# EAGLE board distribution_board_f1 (EAGLE 8.7.1), part 1 of 2
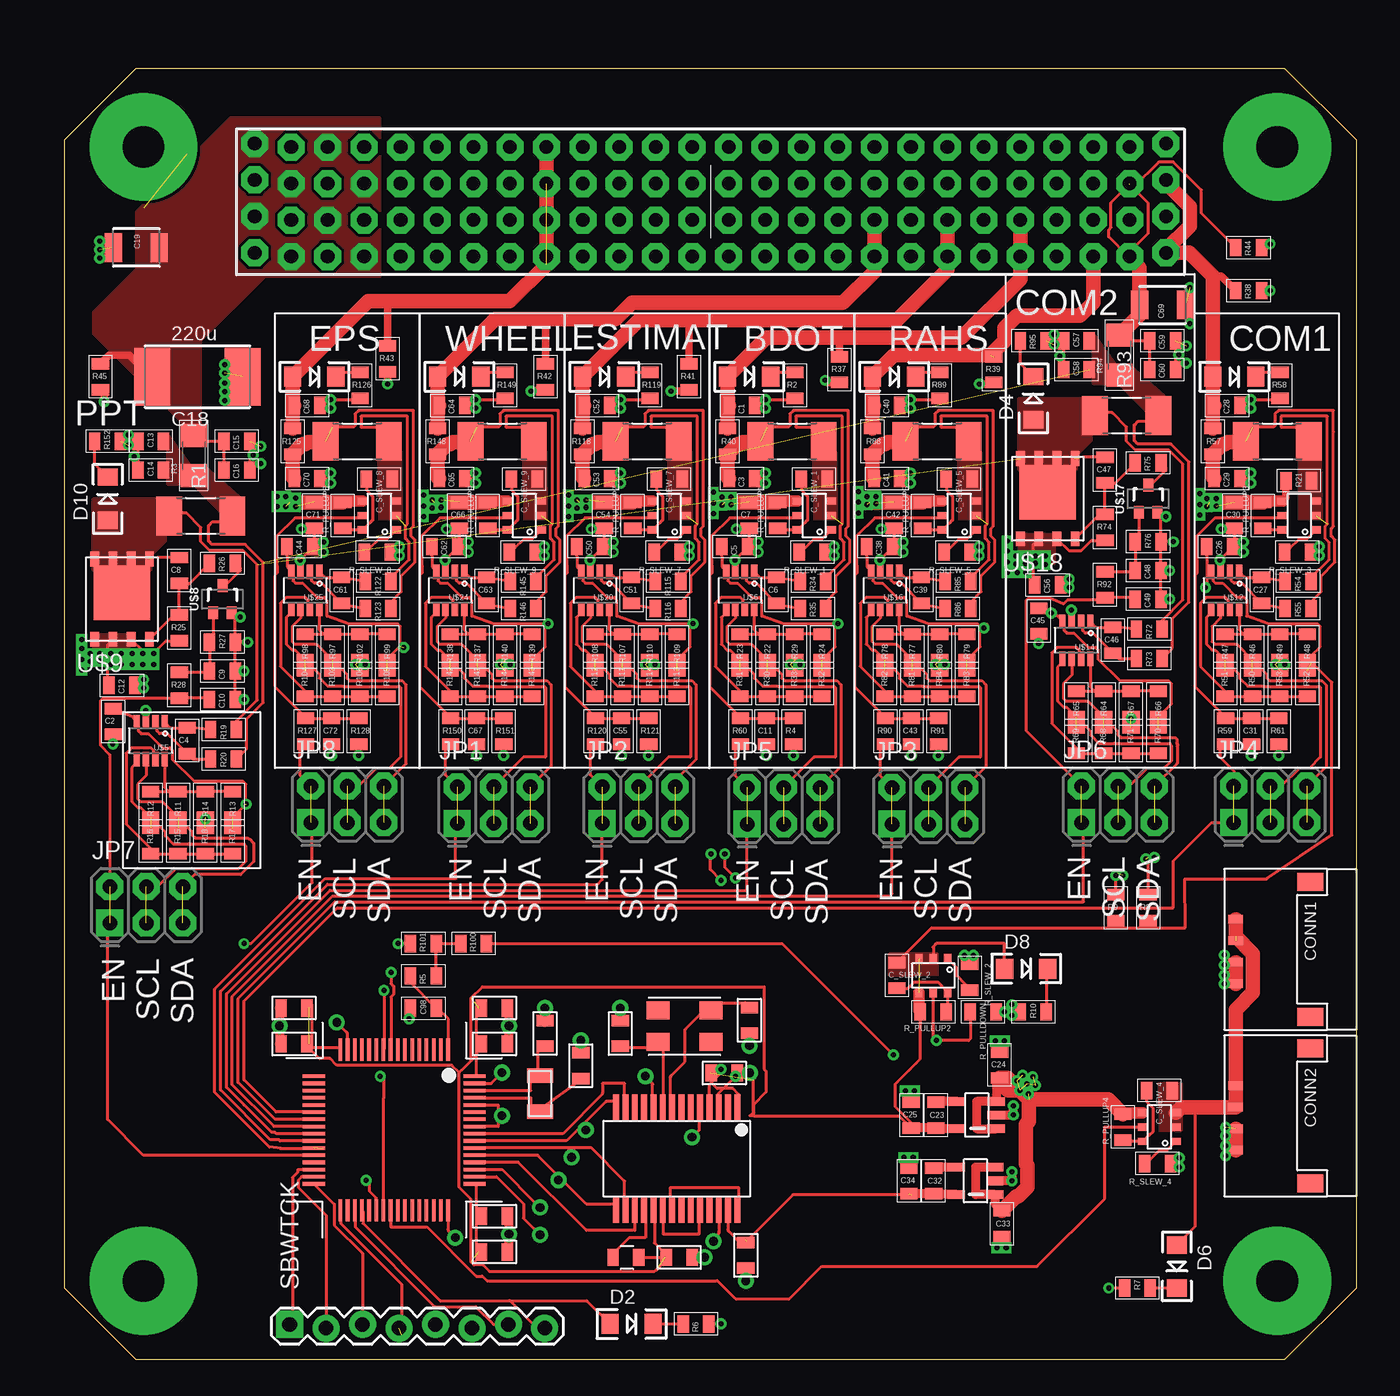
[diagram p0: board, top side]
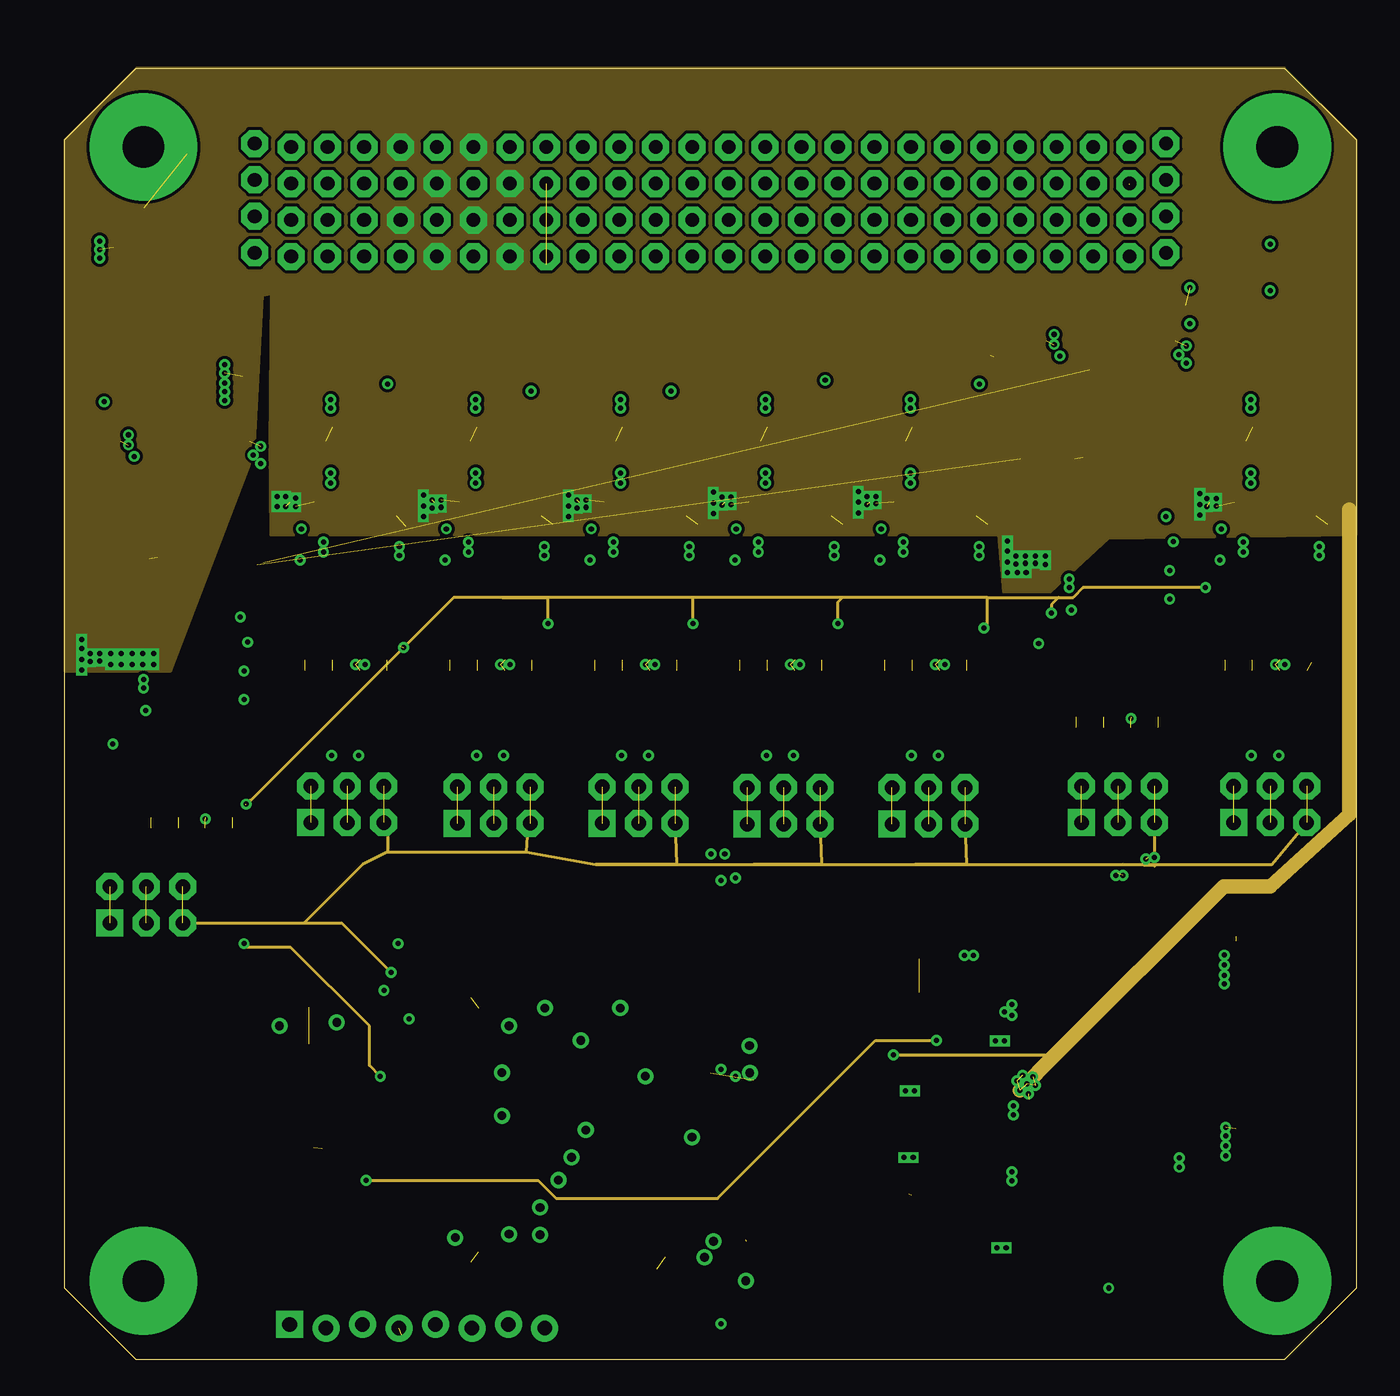
[diagram p1: board, inner layer Route2]
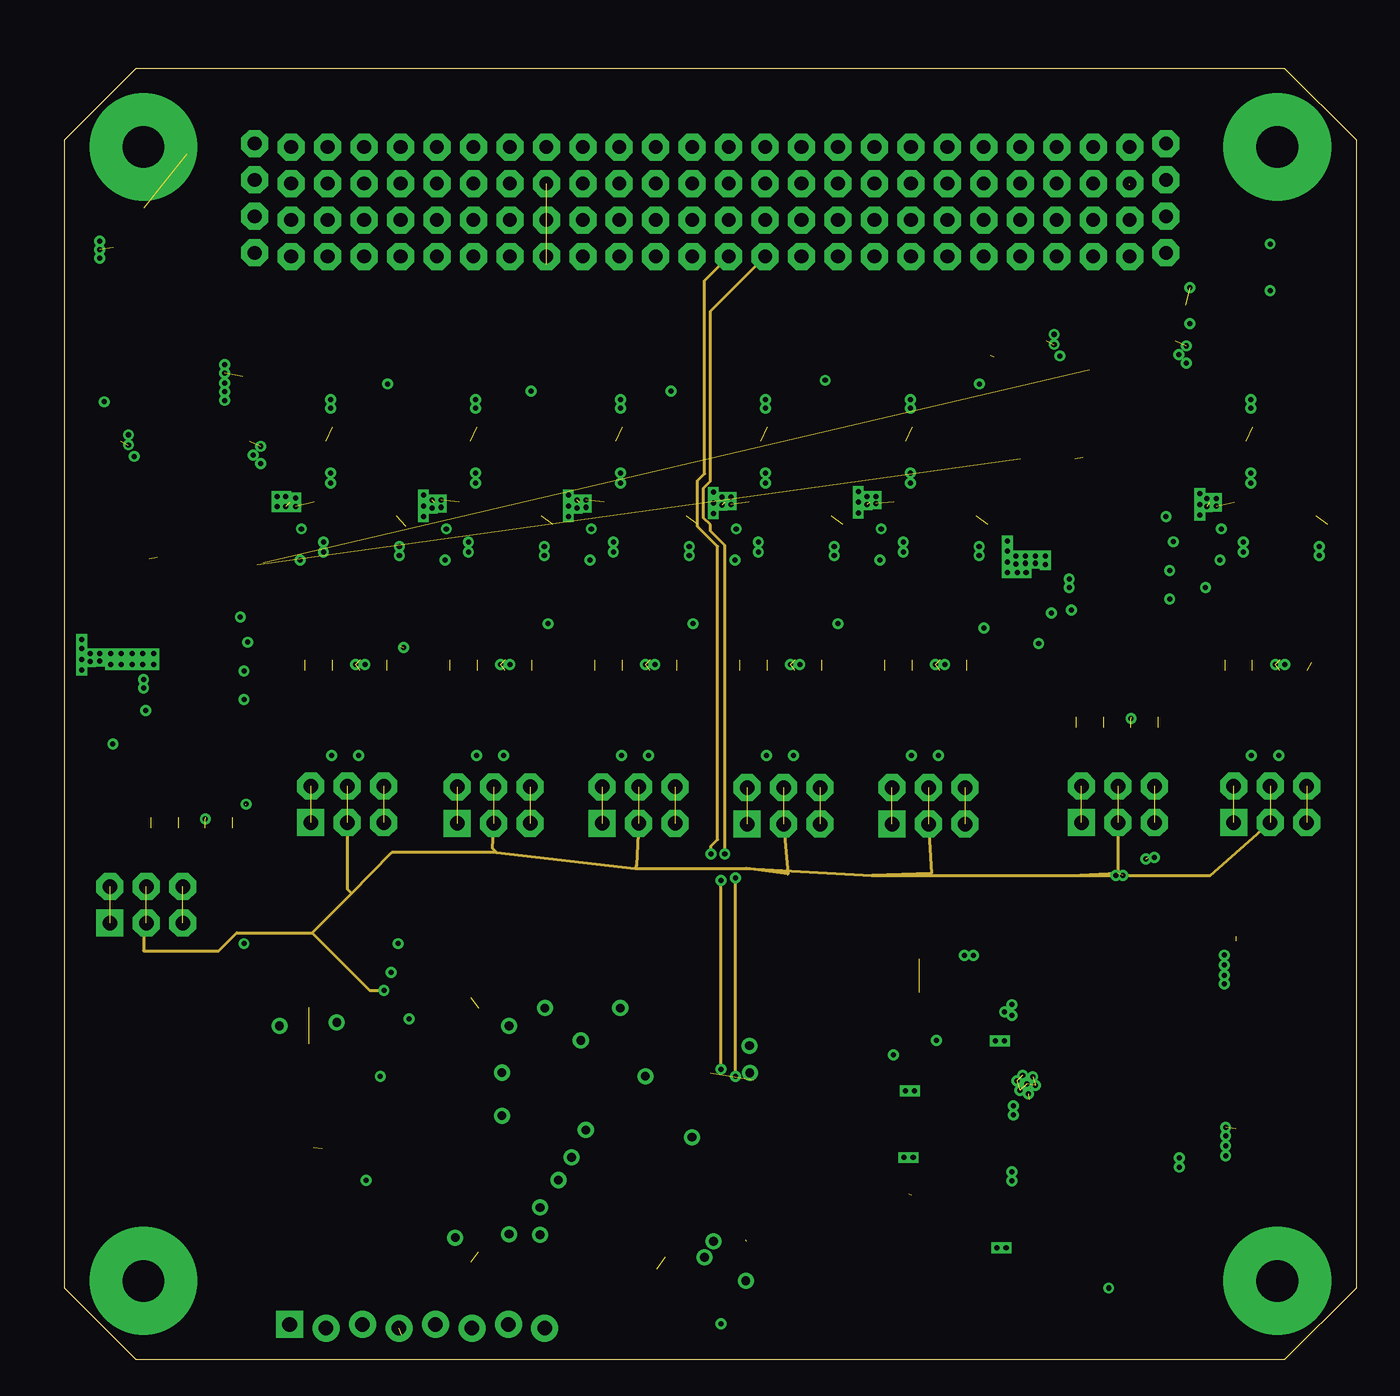
[diagram p2: board, inner layer Route3]
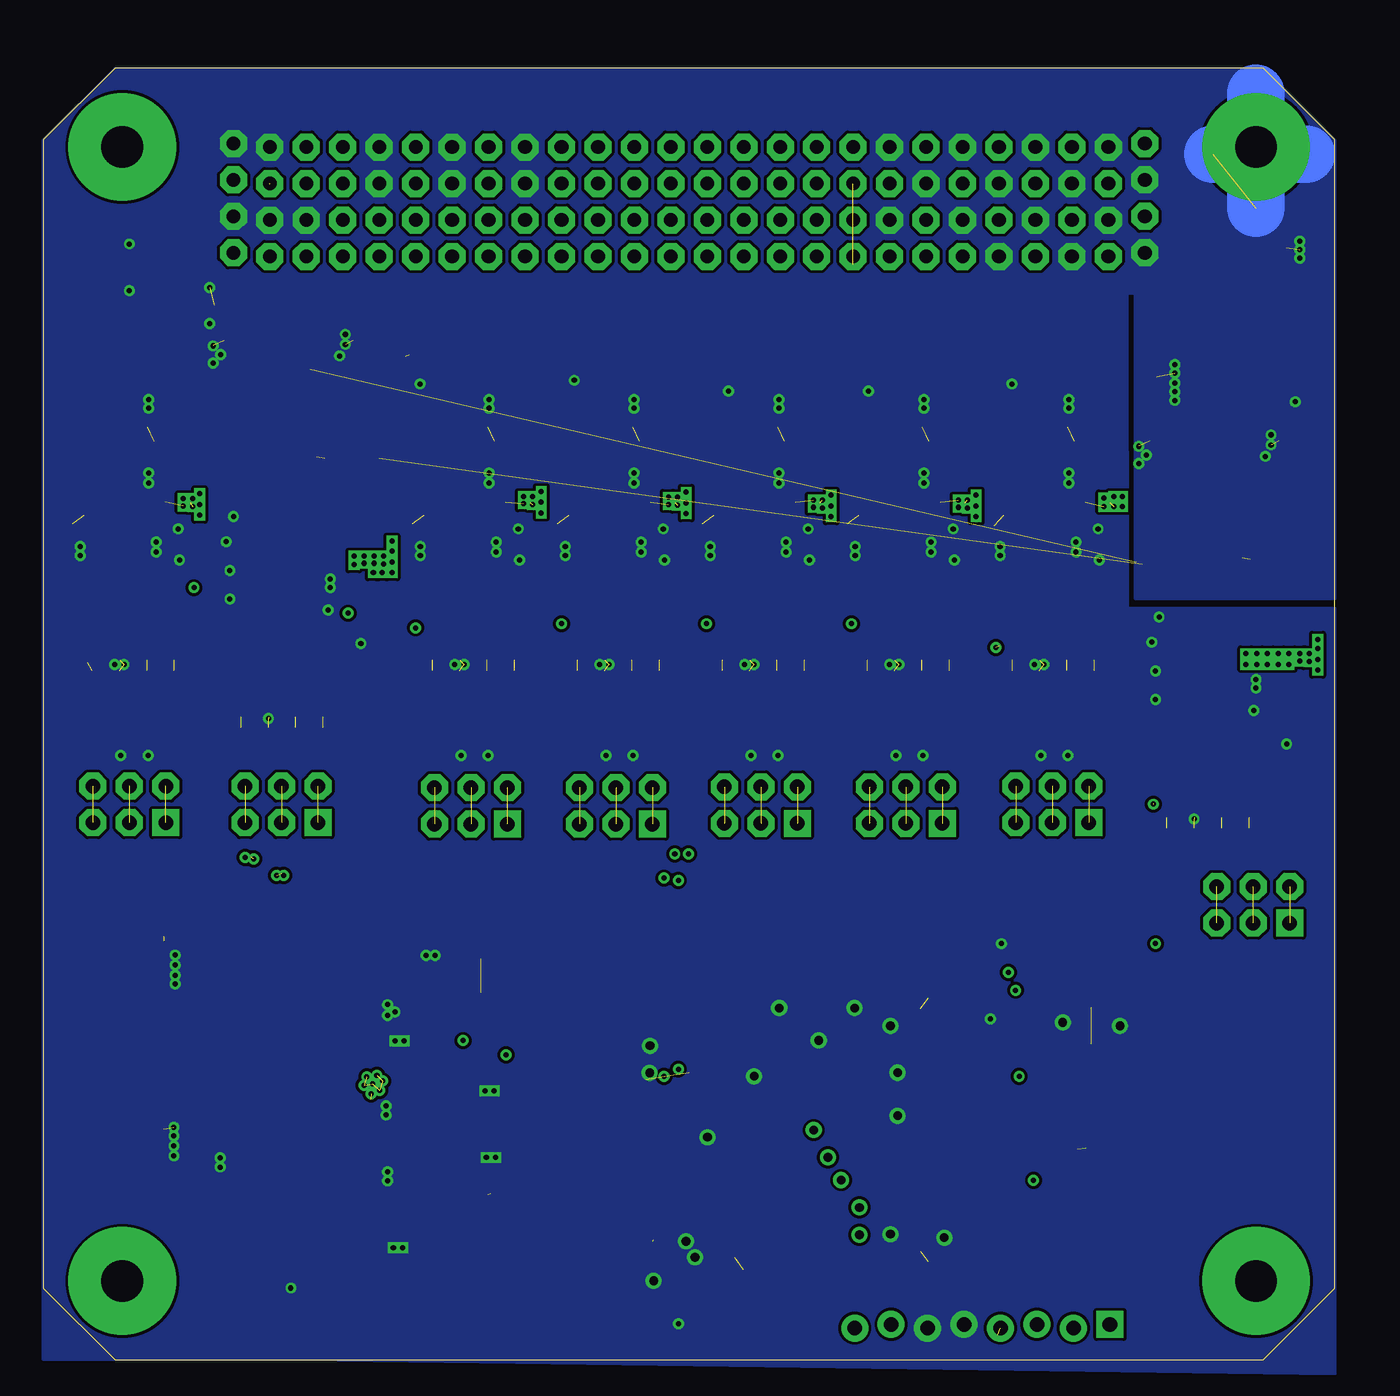
[diagram p3: board, bottom side, seen from below]

Size 90 x 90 mm. Coordinates in mm from the lower left corner, seen from the top.
Copper layers (1*2*3*16): Top 0.035mm / dielectric 1.5mm / Route2 0.035mm / dielectric 0.15mm / Route3 0.035mm / dielectric 0.2mm / Bottom 0.035mm
Design rules "default *": minimum track width 6mil, minimum drill 0.35mm, track to track 8mil, track to pad 8mil, pad to pad 8mil, via to via 8mil, smd to smd 8mil, copper to edge 0mil, drill to drill 8mil, minimum pad ring 10mil, minimum via ring 8mil, stop-mask expansion 4mil, vias tented up to drill 0mil, thermal gap 10mil

## Footprints (pad centres in the part's own frame; a part is rotated, then mirrored left to right if it is on the bottom)
MSP-CAN_BLOCK = smd 1.2 x 0.8: 1 -6,6.08; 2 -6,7.88; 3 -8.5,6.08; 4 -8.5,7.88; 9 -8.5,-6.08; 10 -8.5,-7.88; 11 -6,-6.08; 12 -6,-7.88; 13 8.5,6.08; 14 8.5,7.88; 15 6,6.08; 16 6,7.88; 23 8.875,18.955; 24 8.875,20.755; 25 8.875,17.045; 26 8.875,15.245; 27 -3.975,22.105; 28 -3.975,23.905 | smd 1 x 0.25: 3.3V@CAN1 -3.975,22.025; 3.3V@CAN2 8.875,18.875; 3.3V@MSP1 8.501,5.884; 3.3V@MSP2 -8.533,-5.962; 3.3V_ANALOG@MSP2 -8.482,5.904 | smd 0.8 x 1.2: 5 -5.83,10.5; 6 -7.63,10.5; 7 -3.58,13; 8 -5.38,13; 17 -8.545,24.75; 18 -6.745,24.75; 19 -5.83,15.75; 20 -7.63,15.75; 21 7.83,24.5; 22 9.63,24.5 | smd 0.25 x 1: 5V 7.65,24.5 | smd 1.75 x 0.4: CANH -1.6,21.96; CANL -1.6,22.61; P$65 -1.6,23.91; P$66 -1.6,23.26; P$69 -1.6,21.31; P$70 -1.6,20.66; P$71 -1.6,20.01; P$72 -1.6,19.36; P$73 -1.6,18.71; P$74 -1.6,18.06; P$75 -1.6,17.41; P$76 -1.6,16.76; P$77 -1.6,16.11; P$78 -1.6,15.46; P$79 5.6,15.46; P$80 5.6,16.11; P$81 5.6,16.76; P$82 5.6,17.41; P$83 5.6,18.06; P$84 5.6,18.71; P$85 5.6,19.36; P$86 5.6,20.01; P$87 5.6,20.66; P$88 5.6,21.31; P$89 5.6,21.96; P$90 5.6,22.61; P$91 5.6,23.26; P$92 5.6,23.91 | drill 0.61: GND@1 -3.975,24.775; GND@2 -5.875,24.75; GND@3 -3.75,17.5; GND@4 0.5,20.75; GND@5 -8.5,15.75; GND@7 -8.5,10.5; GND@8 -7.25,8; GND@9 -4,7.5; GND@10 -1,7.5; GND@11 7.75,22.25; GND@12 10.5,24.5; GND@13 8.875,21.625; GND@14 7.25,8; GND@15 7.5,4.25; GND@16 -7.5,-4; GND@17 -7.25,-8; GND@26 -6.25,13; P2.4_SPI-CS2 5.397,10.16; P2.7_SPI-CS3 7.303,10.16; P5.4_SPI-MOSI 3.487,11.434; P5.5_SPI-MISO 1.9,12.354; P5.6_SPI-CLK 0,13.348 | smd 1.55 x 0.25: P1.0_A0 -5.6,3.75; P1.1_A1 -5.6,3.25; P1.2_A2 -5.6,2.75; P1.3_A3 -5.6,-1.75; P1.4_A4 -5.6,-2.25; P1.5_A5 -5.6,-2.75; P1.6_GPIO/PWM 5.6,-0.75; P1.7_GPIO/PWM 5.6,-0.25; P2.1_RXD 5.6,-3.75; P2.2_GPIO/PWM 5.6,-3.25; P3.0_A12 -5.6,2.25; P3.1_A13 -5.6,1.75; P3.2_A14 -5.6,1.25; P3.3_A15 -5.6,0.75; P3.4_GPIO_DEBUG 5.6,-2.75; P3.5_GPIO_DEBUG 5.6,-2.25; P3.6_GPIO/PWM 5.6,-1.75; P3.7_GPIO/PWM 5.6,-1.25; P5.0_I2C-SDA-1 5.6,0.25; P5.1_I2C-SCL-1 5.6,0.75; P7.0_I2C-SDA-2 -5.6,-0.25; P7.1_I2C-SCL-2 -5.6,-0.75; P$8 -5.6,0.25; P$11 -5.6,-1.25; P$15 -5.6,-3.25; P$16 -5.6,-3.75; P$43 5.6,1.25; P$44 5.6,1.75; P$45 5.6,2.25; P$46 5.6,2.75; P$47 5.6,3.25; P$48 5.6,3.75 | smd 0.25 x 1.55: P2.0_TXD 3.75,-5.6; P2.5_GPIO 1.75,-5.6; P2.6_GPIO/PWM 2.25,-5.6; P4.0_GPIO -0.25,-5.6; P4.1_GPIO 0.25,-5.6; P4.2_GPIO 0.75,-5.6; P4.3_GPIO 1.25,-5.6; P7.2_SYNC1 -1.75,-5.6; P7.3_GPIO -1.25,-5.6; P7.4_GPIO -0.75,-5.6; P$17 -3.75,-5.6; P$18 -3.25,-5.6; P$19 -2.75,-5.6; P$49 3.75,5.6; P$50 3.25,5.6; P$51 2.75,5.6; P$52 2.25,5.6; P$53 1.75,5.6; P$54 1.25,5.6; P$55 0.75,5.6; P$56 0.25,5.6; P$57 -0.25,5.6; P$58 -0.75,5.6; P$59 -1.25,5.6; P$60 -1.75,5.6; P$61 -2.25,5.6; P$62 -2.75,5.6; P$63 -3.25,5.6; P$64 -3.75,5.6; PJ.3_SYNC2 -2.25,-5.6; SBWTCK 2.75,-5.6; SBWTDIO 3.25,-5.6 | smd 1 x 1.8: P$93 -3.79,10.16; P$94 -1.29,10.16 | smd 1.25 x 1.6: P$104 -6.13,18.38; P$105 -6.13,22.08; P$106 -8.33,22.08; P$107 -8.33,18.38
0805 = smd 0.8 x 1.2: 1 -0.9,0; 2 0.9,0
2917 = smd 2.5 x 4: 1 -3.15,0; 2 3.15,0
1210 = smd 1.2 x 2: 1 -1.6,0; 2 1.6,0
PICOLOCK_4 = smd 1.25 x 1.8: MNT@1 -2.605,5.2; MNT@2 6.805,5.2 | smd 0.6 x 1: P$1 0,0; P$2 1.5,0; P$3 3,0; P$4 4.5,0
LED-1206 = smd 1.2 x 1.4: A -1.5,0; C 1.5,0
2X3-NS = drill 1.016 pad 1.88 square: 1 -2.54,-1.27 | drill 1.016 pad 1.88 octagon: 2 -2.54,1.27; 3 0,-1.27; 4 0,1.27; 5 2.54,-1.27; 6 2.54,1.27
R2010 = smd 1.8 x 2.7: 1 -2.2,0; 2 2.2,0
1206 = smd 1.6 x 1.8: 1 -1.4,0; 2 1.4,0
SOT-23-5 = smd 0.6 x 1.2: P$1 -0.95,-1.35; P$2 0,-1.35; P$3 0.95,-1.35; P$4 0.95,1.35; P$5 -0.95,1.35
1X08_CONNECTOR = drill 1.016 pad 1.88: 2 2.54,-0.127; 3 5.08,0.127; 4 7.62,-0.127; 5 10.16,0.127; 6 12.7,-0.127; 7 15.24,0.127; 8 17.78,-0.127 | drill 1.016 pad 1.88 square: SBWTCK 0,0.127
PC104_CONNECTOR = drill 0.953 pad 1.88 octagon: P$1 -31.75,32.134; P$2 -31.75,34.674; P$3 -31.75,37.214; P$4 -31.75,39.754; P$5 -29.21,31.88; P$6 -29.21,34.42; P$7 -29.21,36.96; P$8 -29.21,39.5; P$9 -26.67,31.88; P$10 -26.67,34.42; P$11 -26.67,36.96; P$12 -26.67,39.5; P$13 -24.13,31.88; P$14 -24.13,34.42; P$15 -24.13,36.96; P$16 -24.13,39.5; P$17 -21.59,31.88; P$18 -21.59,34.42; P$19 -21.59,36.96; P$20 -21.59,39.5; P$21 -19.05,31.88; P$22 -19.05,34.42; P$23 -19.05,36.96; P$24 -19.05,39.5; P$25 -16.51,31.88; P$26 -16.51,34.42; P$27 -16.51,36.96; P$28 -16.51,39.5; P$29 -13.97,31.88; P$30 -13.97,34.42; P$31 -13.97,36.96; P$32 -13.97,39.5; P$33 -11.43,31.88; P$34 -11.43,34.42; P$35 -11.43,36.96; P$36 -11.43,39.5; P$37 -8.89,31.88; P$38 -8.89,34.42; P$39 -8.89,36.96; P$40 -8.89,39.5; P$41 -6.35,31.88; P$42 -6.35,34.42; P$43 -6.35,36.96; P$44 -6.35,39.5; P$45 -3.81,31.88; P$46 -3.81,34.42; P$47 -3.81,36.96; P$48 -3.81,39.5; P$49 -1.27,31.88; P$50 -1.27,34.42; P$51 -1.27,36.96; P$52 -1.27,39.5; P$53 1.27,31.88; P$54 1.27,34.42; P$55 1.27,36.96; P$56 1.27,39.5; P$57 3.81,31.88; P$58 3.81,34.42; P$59 3.81,36.96; P$60 3.81,39.5; P$61 6.35,31.88; P$62 6.35,34.42; P$63 6.35,36.96; P$64 6.35,39.5; P$65 8.89,31.88; P$66 8.89,34.42; P$67 8.89,36.96; P$68 8.89,39.5; P$69 11.43,31.88; P$70 11.43,34.42; P$71 11.43,36.96; P$72 11.43,39.5; P$73 13.97,31.88; P$74 13.97,34.42; P$75 13.97,36.96; P$76 13.97,39.5; P$77 16.51,31.88; P$78 16.51,34.42; P$79 16.51,36.96; P$80 16.51,39.5; P$81 19.05,31.88; P$82 19.05,34.42; P$83 19.05,36.96; P$84 19.05,39.5; P$85 21.59,31.88; P$86 21.59,34.42; P$87 21.59,36.96; P$88 21.59,39.5; P$89 24.13,31.88; P$90 24.13,34.42; P$91 24.13,36.96; P$92 24.13,39.5; P$93 26.67,31.88; P$94 26.67,34.42; P$95 26.67,36.96; P$96 26.67,39.5; P$97 29.21,31.88; P$98 29.21,34.42; P$99 29.21,36.96; P$100 29.21,39.5; P$101 31.75,32.134; P$102 31.75,34.674; P$103 31.75,37.214; P$104 31.75,39.754
BOARD_TEMPLATE = drill 2.9 pad 7.5: P$1 -39.5,39.5; P$2 -39.5,-39.5; P$3 39.5,-39.5; P$4 39.5,39.5
SOT-23-8 = smd 0.45 x 1: 1 -0.975,-1.3; 2 -0.325,-1.3; 3 0.325,-1.3; 4 0.975,-1.3; 5 0.975,1.3; 6 0.325,1.3; 7 -0.325,1.3; 8 -0.975,1.3
TSOP-6 = smd 0.508 x 0.7: P$1 -1,-1.162; P$2 0,-1.162; P$3 1,-1.162; P$4 1,1.162; P$5 0,1.162; P$6 -1,1.162
SOT-323 = smd 0.7 x 0.9: 1 -0.65,-0.95; 2 0.65,-0.95; 3 0,0.95
POWERDI5060-8 = smd 3.91 x 3.81: D1 0,0.44 | smd 0.61 x 1.02: D2 -1.905,2.795; D3 -0.635,2.795; D4 0.635,2.795; D5 1.905,2.795; G 1.905,-2.795; S1 -1.905,-2.795; S2 -0.635,-2.795; S3 0.635,-2.795

## Placement (x,y rotation side)
BLK1  MSP-CAN_BLOCK  [MSP-CAN_BLOCK]  22.97,16.01 270 top
C1  1u  [0805]  47.2,66.5 0 top
C2  .1u  [0805]  3.39,44.48 270 top
C3  1u  [0805]  47.2,61.4 0 top
C4  1u  [0805]  8.54,43.14 270 top
C5  .1u  [0805]  46.69,56.66 0 top
C6  1u  [0805]  49.61,53.61 270 top
C7  1u  [0805]  47.7,58.85 270 top
C8  .1u  [0805]  8,55 270 top
C9  DNP  [0805]  11,48 0 top
C10  DNP  [0805]  11,46 0 top
C11  .1u  [0805]  48.9,43.8 270 top
C12  1u  [0805]  4,47 0 top
C13  .1u  [0805]  6,64 180 top
C14  1u  [0805]  6,62 180 top
C15  .1u  [0805]  12,64 0 top
C16  1u  [0805]  12,62 0 top
C18  220u  [2917]  9.25,68.5 0 top
C19  10u  [1210]  5,77.5 180 top
C23  .1u  [0805]  60.71,17.05 90 top
C24  1 μF  [0805]  65.15,20.55 270 top
C25  1 μF  [0805]  58.99,17.05 270 top
C26  .1u  [0805]  80.49,56.66 0 top
C27  1u  [0805]  83.41,53.61 270 top
C28  1u  [0805]  81,66.5 0 top
C29  1u  [0805]  81,61.4 0 top
C30  1u  [0805]  81.5,58.85 270 top
C31  .1u  [0805]  82.7,43.8 270 top
C32  .1u  [0805]  60.55,12.47 90 top
C33  1 μF  [0805]  65.32,9.48 90 top
C34  1μF  [0805]  58.84,12.47 270 top
C38  .1u  [0805]  56.79,56.66 0 top
C39  1u  [0805]  59.71,53.61 270 top
C40  1u  [0805]  57.3,66.5 0 top
C41  1u  [0805]  57.3,61.4 0 top
C42  1u  [0805]  57.8,58.85 270 top
C43  .1u  [0805]  59,43.8 270 top
C44  .1u  [0805]  16.39,56.66 0 top
C45  .1u  [0805]  67.89,51.48 270 top
C46  1u  [0805]  73.04,50.14 270 top
C47  .1u  [0805]  72.5,62 270 top
C48  DNP  [0805]  75.5,55 0 top
C49  DNP  [0805]  75.5,53 0 top
C50  .1u  [0805]  36.59,56.66 0 top
C51  1u  [0805]  39.51,53.61 270 top
C52  1u  [0805]  37.1,66.5 0 top
C53  1u  [0805]  37.1,61.4 0 top
C54  1u  [0805]  37.6,58.85 270 top
C55  .1u  [0805]  38.8,43.8 270 top
C56  1u  [0805]  68.5,54 0 top
C57  .1u  [0805]  70.5,71 180 top
C58  1u  [0805]  70.5,69 180 top
C59  .1u  [0805]  76.5,71 0 top
C60  1u  [0805]  76.5,69 0 top
C61  1u  [0805]  19.31,53.61 270 top
C62  .1u  [0805]  26.49,56.66 0 top
C63  1u  [0805]  29.41,53.61 270 top
C64  1u  [0805]  27,66.5 0 top
C65  1u  [0805]  27,61.4 0 top
C66  1u  [0805]  27.5,58.85 270 top
C67  .1u  [0805]  28.7,43.8 270 top
C68  1u  [0805]  16.9,66.5 0 top
C69  10u  [1210]  76.5,73.5 0 top
C70  1u  [0805]  16.9,61.4 0 top
C71  1u  [0805]  17.4,58.85 270 top
C72  .1u  [0805]  18.6,43.8 270 top
C98  .1u  [0805]  25,24.5 180 top
C_SLEW_1  .1u  [0805]  52.23,61.37 180 top
C_SLEW_2  .1u  [0805]  57.99,26.78 270 top
C_SLEW_4  .1u  [0805]  76.28,18.76 180 top
C_SLEW_5  .1u  [0805]  62.33,61.37 180 top
C_SLEW_7  .1u  [0805]  42.13,61.37 180 top
C_SLEW_8  .1u  [0805]  21.93,61.37 180 top
C_SLEW_9  .1u  [0805]  32.03,61.37 180 top
CONN1  PICOLOCK_4PICOLOCK_4  [PICOLOCK_4]  81.6,30.7 270 top
CONN2  PICOLOCK_4PICOLOCK_4  [PICOLOCK_4]  81.6,19.1 270 top
D1  [LED-1206]  47.7,68.5 0 top
D2  [LED-1206]  39.5,2.5 0 top
D3  [LED-1206]  81.5,68.5 0 top
D4  [LED-1206]  67.5,67 90 top
D5  [LED-1206]  57.8,68.5 0 top
D6  [LED-1206]  77.5,6.5 270 top
D7  [LED-1206]  37.6,68.5 0 top
D8  [LED-1206]  67,27.25 0 top
D9  [LED-1206]  27.5,68.5 0 top
D10  [LED-1206]  3,60 90 top
D11  [LED-1206]  17.4,68.5 0 top
JP1  [2X3-NS]  29.9,38.65 0 top
JP2  [2X3-NS]  40,38.65 0 top
JP3  [2X3-NS]  60.2,38.6 0 top
JP4  [2X3-NS]  84,38.7 0 top
JP5  [2X3-NS]  50.1,38.6 0 top
JP6  [2X3-NS]  73.4,38.7 0 top
JP7  [2X3-NS]  5.7,31.7 0 top
JP8  [2X3-NS]  19.7,38.7 0 top
R1  .02  [R2010]  9.5,58.8 0 top
R2  500  [0805]  50.9,67.9 270 top
R3  [1206]  9,63 90 top
R4  100k  [0805]  50.8,43.8 270 top
R5  100  [0805]  25,26.75 0 top
R6  500  [0805]  44,2.5 0 top
R7  5000  [0805]  74.75,5 180 top
R8  53k  [0805]  75.5,31.5 270 top
R9  53k  [0805]  73.25,31.5 270 top
R10  500  [0805]  67.5,24.25 180 top
R11  DNP  [0805]  7.91,38.7 270 top
R12  DNP  [0805]  6,38.7 270 top
R13  DNP  [0805]  11.72,38.7 270 top
R14  0  [0805]  9.81,38.7 270 top
R15  DNP  [0805]  7.91,36.16 90 top
R16  DNP  [0805]  6,36.16 90 top
R17  0  [0805]  11.72,36.16 90 top
R18  DNP  [0805]  9.81,36.16 90 top
R19  10  [0805]  11.08,43.91 0 top
R20  10  [0805]  11.08,41.87 0 top
R21  0  [0805]  86,61.25 180 top
R22  DNP  [0805]  48.97,49.67 270 top
R23  DNP  [0805]  47.07,49.67 270 top
R24  DNP  [0805]  52.78,49.67 270 top
R25  1M  [0805]  8,51 270 top
R26  20k  [0805]  11,55.5 0 top
R27  100k  [0805]  11,50 180 top
R28  100  [0805]  8,47 270 top
R29  0  [0805]  50.88,49.67 270 top
R30  0  [0805]  48.97,47.13 90 top
R31  DNP  [0805]  47.07,47.13 90 top
R32  DNP  [0805]  52.78,47.13 90 top
R33  DNP  [0805]  50.88,47.13 90 top
R34  10  [0805]  52.15,54.25 0 top
R35  10  [0805]  52.15,52.34 0 top
R36  .1  [R2010]  50.7,64 0 top
R37  5000  [0805]  54,69 270 top
R38  5000  [0805]  82.5,74.5 0 top
R39  5000  [0805]  64.75,69 270 top
R40  DNP  [0805]  46.2,64 90 top
R41  5000  [0805]  43.5,68.5 270 top
R42  5000  [0805]  33.5,68.5 270 top
R43  5000  [0805]  22.5,69.75 270 top
R44  5000  [0805]  82.5,77.5 0 top
R45  5000  [0805]  2.5,68.5 270 top
R46  DNP  [0805]  82.77,49.67 270 top
R47  DNP  [0805]  80.87,49.67 270 top
R48  DNP  [0805]  86.58,49.67 270 top
R49  0  [0805]  84.68,49.67 270 top
R50  DNP  [0805]  82.77,47.13 90 top
R51  0  [0805]  80.87,47.13 90 top
R52  DNP  [0805]  86.58,47.13 90 top
R53  DNP  [0805]  84.68,47.13 90 top
R54  10  [0805]  85.95,54.25 0 top
R55  10  [0805]  85.95,52.34 0 top
R56  .1  [R2010]  84.5,64 0 top
R57  DNP  [0805]  80,64 90 top
R58  500  [0805]  84.7,67.9 270 top
R59  100  [0805]  80.9,43.8 270 top
R60  100  [0805]  47.1,43.8 270 top
R61  100k  [0805]  84.6,43.8 270 top
R64  DNP  [0805]  72.41,45.7 270 top
R65  DNP  [0805]  70.5,45.7 270 top
R66  DNP  [0805]  76.22,45.7 270 top
R67  0  [0805]  74.31,45.7 270 top
R68  DNP  [0805]  72.41,43.16 90 top
R69  DNP  [0805]  70.5,43.16 90 top
R70  DNP  [0805]  76.22,43.16 90 top
R71  0  [0805]  74.31,43.16 90 top
R72  10  [0805]  75.58,50.91 0 top
R73  10  [0805]  75.58,48.87 0 top
R74  1M  [0805]  72.5,58 270 top
R75  20k  [0805]  75.5,62.5 0 top
R76  100k  [0805]  75.5,57 180 top
R77  DNP  [0805]  59.07,49.67 270 top
R78  DNP  [0805]  57.17,49.67 270 top
R79  0  [0805]  62.88,49.67 270 top
R80  DNP  [0805]  60.98,49.67 270 top
R81  DNP  [0805]  59.07,47.13 90 top
R82  DNP  [0805]  57.17,47.13 90 top
R83  DNP  [0805]  62.88,47.13 90 top
R84  0  [0805]  60.98,47.13 90 top
R85  10  [0805]  62.25,54.25 0 top
R86  10  [0805]  62.25,52.34 0 top
R87  .1  [R2010]  60.8,64 0 top
R88  DNP  [0805]  56.3,64 90 top
R89  500  [0805]  61,67.9 270 top
R90  100  [0805]  57.2,43.8 270 top
R91  100k  [0805]  60.9,43.8 270 top
R92  100  [0805]  72.5,54 270 top
R93  .02  [R2010]  74,65.8 0 top
R94  [1206]  73.5,70 90 top
R95  500  [0805]  67.5,71 0 top
R97  DNP  [0805]  18.67,49.67 270 top
R98  DNP  [0805]  16.77,49.67 270 top
R99  0  [0805]  22.48,49.67 270 top
R100  100k  [0805]  28.5,29 0 top
R101  53k  [0805]  25,29 0 top
R102  DNP  [0805]  20.58,49.67 270 top
R103  0  [0805]  18.67,47.13 90 top
R104  DNP  [0805]  16.77,47.13 90 top
R105  DNP  [0805]  22.48,47.13 90 top
R106  DNP  [0805]  20.58,47.13 90 top
R107  DNP  [0805]  38.87,49.67 270 top
R108  DNP  [0805]  36.97,49.67 270 top
R109  0  [0805]  42.68,49.67 270 top
R110  DNP  [0805]  40.78,49.67 270 top
R111  DNP  [0805]  38.87,47.13 90 top
R112  DNP  [0805]  36.97,47.13 90 top
R113  0  [0805]  42.68,47.13 90 top
R114  DNP  [0805]  40.78,47.13 90 top
R115  10  [0805]  42.05,54.25 0 top
R116  10  [0805]  42.05,52.34 0 top
R117  .1  [R2010]  40.6,64 0 top
R118  DNP  [0805]  36.1,64 90 top
R119  500  [0805]  40.8,67.9 270 top
R120  100  [0805]  37,43.8 270 top
R121  100k  [0805]  40.7,43.8 270 top
R122  10  [0805]  21.85,54.25 0 top
R123  10  [0805]  21.85,52.34 0 top
R124  .1  [R2010]  20.4,64 0 top
R125  DNP  [0805]  15.9,64 90 top
R126  500  [0805]  20.6,67.9 270 top
R127  100  [0805]  16.8,43.8 270 top
R128  100k  [0805]  20.5,43.8 270 top
R137  DNP  [0805]  28.77,49.67 270 top
R138  0  [0805]  26.87,49.67 270 top
R139  DNP  [0805]  32.58,49.67 270 top
R140  DNP  [0805]  30.68,49.67 270 top
R141  0  [0805]  28.77,47.13 90 top
R142  DNP  [0805]  26.87,47.13 90 top
R143  DNP  [0805]  32.58,47.13 90 top
R144  DNP  [0805]  30.68,47.13 90 top
R145  10  [0805]  31.95,54.25 0 top
R146  10  [0805]  31.95,52.34 0 top
R147  .1  [R2010]  30.5,64 0 top
R148  DNP  [0805]  26,64 90 top
R149  500  [0805]  30.7,67.9 270 top
R150  100  [0805]  26.9,43.8 270 top
R151  100k  [0805]  30.6,43.8 270 top
R152  500  [0805]  3,64 0 top
R_PULLDOWN  100k  [0805]  64,24.25 180 top
R_PULLUP1  100k  [0805]  49.69,58.83 90 top
R_PULLUP2  100k  [0805]  60.53,24.24 180 top
R_PULLUP3  100k  [0805]  83.49,58.83 90 top
R_PULLUP4  100k  [0805]  73.74,16.22 90 top
R_PULLUP5  100k  [0805]  59.79,58.83 90 top
R_PULLUP7  100k  [0805]  39.59,58.83 90 top
R_PULLUP8  100k  [0805]  19.39,58.83 90 top
R_PULLUP9  100k  [0805]  29.49,58.83 90 top
R_SLEW_1  5k  [0805]  52.1,56.29 180 top
R_SLEW_2  5k  [0805]  63.07,26.65 270 top
R_SLEW_3  5k  [0805]  85.9,56.29 180 top
R_SLEW_4  5k  [0805]  76.15,13.68 180 top
R_SLEW_5  5k  [0805]  62.2,56.29 180 top
R_SLEW_7  5k  [0805]  42,56.29 180 top
R_SLEW_8  5k  [0805]  21.8,56.29 180 top
R_SLEW_9  5k  [0805]  31.9,56.29 180 top
U2  TPS732XX  [SOT-23-5]  63.56,17.05 90 top
U3  TPS732XX  [SOT-23-5]  63.48,12.47 90 top
U$1  PROGRAM/DEBUG_PORT  [1X08_CONNECTOR]  15.68,2.34 0 top
U$2  PC104_CONNECTOR  [PC104_CONNECTOR]  45,45 0 top
U$3  BOARD_TEMPLATE1  [BOARD_TEMPLATE]  45,45 0 top
U$5  INA219  [SOT-23-8]  6,43.14 180 top
U$6  INA219  [SOT-23-8]  47.07,53.61 180 top
U$7  SI3865DDV  [TSOP-6]  60.53,26.78 180 top
U$8  DMN5L06WK  [SOT-323]  11,53 0 top
U$9  DMP2002UPS  [POWERDI5060-8]  4,53 0 top
U$10  SI3865DDV  [TSOP-6]  86.03,58.83 90 top
U$11  SI3865DDV  [TSOP-6]  52.23,58.83 90 top
U$12  INA219  [SOT-23-8]  80.87,53.61 180 top
U$13  SI3865DDV  [TSOP-6]  76.28,16.22 90 top
U$14  INA219  [SOT-23-8]  70.5,50.14 180 top
U$15  SI3865DDV  [TSOP-6]  62.33,58.83 90 top
U$16  INA219  [SOT-23-8]  57.17,53.61 180 top
U$17  DMN5L06WK  [SOT-323]  75.5,60 0 top
U$18  DMP2002UPS  [POWERDI5060-8]  68.5,60 0 top
U$19  SI3865DDV  [TSOP-6]  42.13,58.83 90 top
U$20  INA219  [SOT-23-8]  36.97,53.61 180 top
U$22  SI3865DDV  [TSOP-6]  21.93,58.83 90 top
U$23  SI3865DDV  [TSOP-6]  32.03,58.83 90 top
U$24  INA219  [SOT-23-8]  26.87,53.61 180 top
U$25  INA219  [SOT-23-8]  16.77,53.61 180 top

## Library data of the parts
BLK1 C1-C16 C18 C19 C23-C34 C38-C72 C98 C_SLEW_1 C_SLEW_2 C_SLEW_4 C_SLEW_5 C_SLEW_7-C_SLEW_9 CONN1 CONN2 D1-D11 R1-R61 R64-R95 R97-R128 R137-R152 R_PULLDOWN R_PULLUP1-R_PULLUP5 R_PULLUP7-R_PULLUP9 R_SLEW_1-R_SLEW_5 R_SLEW_7-R_SLEW_9 U2 U3 U$1-U$3 U$5-U$20 U$22-U$25 = DubSat1 Components
JP1-JP8 = SparkFun-Connectors

## Nets
3.3V: BLK1.3.3V@CAN1 BLK1.3.3V@CAN2 BLK1.3.3V@MSP1 BLK1.3.3V@MSP2 BLK1.3.3V_ANALOG@MSP2 C2.1 C5.1 C23.1 C25.2 C26.1 C38.1 C44.1 C45.1 C50.1 C62.1 C_SLEW_2.1 D8.A R8.2 R9.2 R13.2 R17.2 R24.2 R32.2 R48.2 R52.2 R66.2 R70.2 R79.2 R83.2 R99.2 R105.2 R109.2 R113.2 R139.2 R143.2 R_PULLUP2.2 U2.P$5 U$5.4 U$6.4 U$7.P$2 U$7.P$3 U$7.P$4 U$12.4 U$14.4 U$16.4 U$20.4 U$24.4 U$25.4
5V: BLK1.5V C32.1 C34.2 U3.P$5
BDOT: C1.1 D1.A R37.1 R40.2 U$2.P$85 U$2.P$86
BUS: C8.1 C47.1 D4.A D10.A R1.1 R19.2 R72.2 R93.1 U$9.D1 U$9.D2 U$9.D3 U$9.D4 U$9.D5 U$18.D1 U$18.D2 U$18.D3 U$18.D4 U$18.D5
CANH: BLK1.CANH U$2.P$53
CANL: BLK1.CANL U$2.P$57
COM1: C28.1 D3.A R38.1 R57.2 U$2.P$101 U$2.P$103
COM2: C59.1 C60.1 C69.1 R44.1 R94.2 U$2.P$97 U$2.P$99
DEPLOY: C_SLEW_4.1 CONN1.P$1 CONN1.P$2 CONN2.P$1 CONN2.P$2 D6.A U$13.P$2 U$13.P$3
EN_BDOT: BLK1.P4.1_GPIO JP5.1 JP5.2 R60.2
EN_COM1: BLK1.P7.3_GPIO JP4.1 JP4.2 R59.2
EN_COM2: BLK1.P7.4_GPIO C49.1 JP6.1 JP6.2 R92.2
EN_DEPLOY: BLK1.P1.7_GPIO/PWM U$13.P$5
EN_EPS: BLK1.P1.6_GPIO/PWM JP8.1 JP8.2 R127.2
EN_ESTIMAT: BLK1.P4.2_GPIO JP2.1 JP2.2 R120.2
EN_INA: BLK1.P3.7_GPIO/PWM R_PULLDOWN.2 U$7.P$5
EN_PPT: BLK1.P2.5_GPIO C10.1 JP7.1 JP7.2 R28.2
EN_RAHS: BLK1.P4.0_GPIO JP3.1 JP3.2 R90.2
EN_WHEEL: BLK1.P4.3_GPIO JP1.1 JP1.2 R150.2
EPS: C68.1 D11.A R43.1 R125.2 U$2.P$33 U$2.P$34 U$2.P$35 U$2.P$36
ESTIMAT: C52.1 D7.A R41.1 R118.2 U$2.P$77 U$2.P$78
GND: BLK1.GND@1 BLK1.GND@2 BLK1.GND@3 BLK1.GND@4 BLK1.GND@5 BLK1.GND@7 BLK1.GND@8 BLK1.GND@9 BLK1.GND@10 BLK1.GND@11 BLK1.GND@12 BLK1.GND@13 BLK1.GND@14 BLK1.GND@15 BLK1.GND@16 BLK1.GND@17 BLK1.GND@26 C1.2 C2.2 C3.2 C5.2 C7.2 C9.2 C10.2 C11.2 C12.2 C13.2 C14.2 C15.2 C16.2 C18.2 C19.2 C24.1 C25.1 C26.2 C28.2 C29.2 C30.2 C31.2 C33.1 C34.1 C38.2 C40.2 C41.2 C42.2 C43.2 C44.2 C45.2 C48.2 C49.2 C50.2 C52.2 C53.2 C54.2 C55.2 C56.2 C57.2 C58.2 C59.2 C60.2 C62.2 C64.2 C65.2 C66.2 C67.2 C68.2 C69.2 C70.2 C71.2 C72.2 C98.2 CONN1.P$3 CONN1.P$4 CONN2.P$3 CONN2.P$4 R2.2 R4.2 R6.2 R7.2 R10.2 R14.2 R18.2 R27.1 R29.2 R33.2 R37.2 R38.2 R39.2 R41.2 R42.2 R43.2 R44.2 R45.2 R49.2 R53.2 R58.2 R61.2 R67.2 R71.2 R76.1 R80.2 R84.2 R89.2 R91.2 R95.2 R101.1 R102.2 R106.2 R110.2 R114.2 R119.2 R121.2 R126.2 R128.2 R140.2 R144.2 R149.2 R151.2 R152.2 R_PULLDOWN.1 R_SLEW_1.1 R_SLEW_2.1 R_SLEW_3.1 R_SLEW_4.1 R_SLEW_5.1 R_SLEW_7.1 R_SLEW_8.1 R_SLEW_9.1 U2.P$2 U3.P$2 U$1.5 U$1.6 U$2.P$1 U$2.P$3 U$2.P$6 U$2.P$8 U$2.P$9 U$2.P$11 U$2.P$14 U$2.P$16 U$2.P$17 U$2.P$19 U$2.P$22 U$2.P$24 U$2.P$27 U$2.P$30 U$2.P$32 U$2.P$71 U$2.P$72 U$2.P$79 U$2.P$80 U$2.P$87 U$2.P$88 U$2.P$94 U$2.P$98 U$2.P$100 U$2.P$102 U$2.P$104 U$5.3 U$6.3 U$8.2 U$12.3 U$14.3 U$16.3 U$17.2 U$20.3 U$24.3 U$25.3
INA219_A0_1: R15.1 R16.1 R17.1 R18.1 U$5.7
INA219_A0_2: R30.1 R31.1 R32.1 R33.1 U$6.7
INA219_A0_4: R50.1 R51.1 R52.1 R53.1 U$12.7
INA219_A0_5: R68.1 R69.1 R70.1 R71.1 U$14.7
INA219_A0_6: R81.1 R82.1 R83.1 R84.1 U$16.7
INA219_A0_7: R103.1 R104.1 R105.1 R106.1 U$25.7
INA219_A0_8: R111.1 R112.1 R113.1 R114.1 U$20.7
INA219_A0_10: R141.1 R142.1 R143.1 R144.1 U$24.7
INA219_A1_1: R11.1 R12.1 R13.1 R14.1 U$5.8
INA219_A1_2: R22.1 R23.1 R24.1 R29.1 U$6.8
INA219_A1_4: R46.1 R47.1 R48.1 R49.1 U$12.8
INA219_A1_5: R64.1 R65.1 R66.1 R67.1 U$14.8
INA219_A1_6: R77.1 R78.1 R79.1 R80.1 U$16.8
INA219_A1_7: R97.1 R98.1 R99.1 R102.1 U$25.8
INA219_A1_8: R107.1 R108.1 R109.1 R110.1 U$20.8
INA219_A1_10: R137.1 R138.1 R139.1 R140.1 U$24.8
INA219_IN+_1: C4.1 R19.1 U$5.1
INA219_IN+_2: C6.1 R34.1 U$6.1
INA219_IN+_4: C27.1 R54.1 U$12.1
INA219_IN+_5: C46.1 R72.1 U$14.1
INA219_IN+_6: C39.1 R85.1 U$16.1
INA219_IN+_7: C61.1 R122.1 U$25.1
INA219_IN+_8: C51.1 R115.1 U$20.1
INA219_IN+_10: C63.1 R145.1 U$24.1
INA219_IN-_1: C4.2 R20.1 U$5.2
INA219_IN-_2: C6.2 R35.1 U$6.2
INA219_IN-_4: C27.2 R55.1 U$12.2
INA219_IN-_5: C46.2 R73.1 U$14.2
INA219_IN-_6: C39.2 R86.1 U$16.2
INA219_IN-_7: C61.2 R123.1 U$25.2
INA219_IN-_8: C51.2 R116.1 U$20.2
INA219_IN-_10: C63.2 R146.1 U$24.2
LDO_3V3_BYP2: C23.2 U2.P$4
LDO_5V_BYP2: C32.2 U3.P$4
LOAD: C13.1 C14.1 C57.1 C58.1 R1.2 R3.1 R20.2 R73.2 R93.2 R94.1
N$1: C8.2 R25.1 R26.1 U$9.G
N$2: C9.1 R27.2 R28.1 U$8.1
N$3: D1.C R2.1
N$4: C11.1 R4.1 R60.1 U$11.P$5
N$5: R5.2 R100.1 R101.2
N$6: R26.2 U$8.3
N$7: BLK1.P1.0_A0 C98.1 R5.1
N$8: R_SLEW_2.2 U$7.P$1
N$9: R_SLEW_1.2 U$11.P$1
N$10: C_SLEW_1.2 R_PULLUP1.1 U$11.P$6
N$11: C_SLEW_2.2 R_PULLUP2.1 U$7.P$6
N$12: R_SLEW_3.2 U$10.P$1
N$13: R_PULLUP3.1 U$10.P$6
N$14: D3.C R58.1
N$15: C31.1 R59.1 R61.1 U$10.P$5
N$16: C47.2 R74.1 R75.1 U$18.G
N$17: C48.1 R76.2 R92.1 U$17.1
N$18: R75.2 U$17.3
N$19: D4.C R95.1
N$20: R_SLEW_5.2 U$15.P$1
N$21: C_SLEW_5.2 R_PULLUP5.1 U$15.P$6
N$22: D5.C R89.1
N$23: C43.1 R90.1 R91.1 U$15.P$5
N$24: BLK1.P3.5_GPIO_DEBUG D2.A U$1.8
N$25: BLK1.P3.4_GPIO_DEBUG U$1.7
N$26: BLK1.P2.1_RXD U$1.4
N$27: BLK1.P2.0_TXD U$1.3
N$28: R_SLEW_7.2 U$19.P$1
N$29: C_SLEW_7.2 R_PULLUP7.1 U$19.P$6
N$30: D7.C R119.1
N$31: C55.1 R120.1 R121.1 U$19.P$5
N$32: BLK1.SBWTDIO U$1.2
N$33: BLK1.SBWTCK U$1.SBWTCK
N$34: R_SLEW_4.2 U$13.P$1
N$35: C_SLEW_4.2 R_PULLUP4.1 U$13.P$6
N$36: R_SLEW_9.2 U$23.P$1
N$37: C_SLEW_9.2 R_PULLUP9.1 U$23.P$6
N$38: D9.C R149.1
N$39: C67.1 R150.1 R151.1 U$23.P$5
N$40: D10.C R152.1
N$43: D2.C R6.1
N$44: D8.C R10.1
N$45: D6.C R7.1
N$48: U$2.P$25
N$50: R_SLEW_8.2 U$22.P$1
N$51: C_SLEW_8.2 R_PULLUP8.1 U$22.P$6
N$52: D11.C R126.1
N$53: C72.1 R127.1 R128.1 U$22.P$5
OUT_1: C_SLEW_1.1 R34.2 R36.2 U$11.P$2 U$11.P$3
OUT_3: R21.1 R54.2 R56.2 U$10.P$2 U$10.P$3
OUT_4: C_SLEW_8.1 R122.2 R124.2 U$22.P$2 U$22.P$3
OUT_5: C_SLEW_5.1 R85.2 R87.2 U$15.P$2 U$15.P$3
OUT_7: C_SLEW_7.1 R115.2 R117.2 U$19.P$2 U$19.P$3
OUT_9: C_SLEW_9.1 R145.2 R147.2 U$23.P$2 U$23.P$3
OUTPUT1: C3.1 R35.2 R36.1 R40.1
OUTPUT3: C29.1 R55.2 R56.1 R57.1
OUTPUT4: C70.1 R123.2 R124.1 R125.1
OUTPUT5: C41.1 R86.2 R87.1 R88.1
OUTPUT7: C53.1 R116.2 R117.1 R118.1
OUTPUT9: C65.1 R146.2 R147.1 R148.1
PPT: C15.1 C16.1 C18.1 C19.1 R3.2 R45.1 U$2.P$2 U$2.P$4 U$2.P$5 U$2.P$7 U$2.P$10 U$2.P$12 U$2.P$13 U$2.P$15
RAHS: C40.1 D5.A R39.1 R88.2 U$2.P$93
SCL: BLK1.P7.1_I2C-SCL-2 JP1.3 JP1.4 JP2.3 JP2.4 JP3.3 JP3.4 JP4.3 JP4.4 JP5.3 JP5.4 JP6.3 JP6.4 JP7.3 JP7.4 JP8.3 JP8.4 R9.1 R12.2 R16.2 R23.2 R31.2 R47.2 R51.2 R65.2 R69.2 R78.2 R82.2 R98.2 R104.2 R108.2 R112.2 R138.2 R142.2 U$5.5 U$6.5 U$12.5 U$14.5 U$16.5 U$20.5 U$24.5 U$25.5
SDA: BLK1.P7.0_I2C-SDA-2 JP1.5 JP1.6 JP2.5 JP2.6 JP3.5 JP3.6 JP4.5 JP4.6 JP5.5 JP5.6 JP6.5 JP6.6 JP7.5 JP7.6 JP8.5 JP8.6 R8.1 R11.2 R15.2 R22.2 R30.2 R46.2 R50.2 R64.2 R68.2 R77.2 R81.2 R97.2 R103.2 R107.2 R111.2 R137.2 R141.2 U$5.6 U$6.6 U$12.6 U$14.6 U$16.6 U$20.6 U$24.6 U$25.6
VBAT: C7.1 C12.1 C24.2 C30.1 C33.2 C42.1 C54.1 C56.1 C66.1 C71.1 R21.2 R25.2 R74.2 R100.2 R_PULLUP1.2 R_PULLUP3.2 R_PULLUP4.2 R_PULLUP5.2 R_PULLUP7.2 R_PULLUP8.2 R_PULLUP9.2 U2.P$1 U2.P$3 U3.P$1 U3.P$3 U$2.P$18 U$2.P$20 U$2.P$21 U$2.P$23 U$2.P$26 U$2.P$28 U$2.P$29 U$2.P$31 U$9.S1 U$9.S2 U$9.S3 U$10.P$4 U$11.P$4 U$13.P$4 U$15.P$4 U$18.S1 U$18.S2 U$18.S3 U$19.P$4 U$22.P$4 U$23.P$4
WHEEL: C64.1 D9.A R42.1 R148.2 U$2.P$69 U$2.P$70